# Altium PCB DC-DCBuckConv.PcbDoc (part 2 of 2)
Units mm, origin at the board's own origin, x right, y up, seen from the top; angles counter-clockwise.
Board outline 34.34 x 69.93 mm, 4 copper layers (Top Layer, GND, POWER, Bottom Layer), stack 1.369 mm thick; 52 components, 51 nets, 193 pads, 133 vias.
Unrouted connection lines stored in the file: 1.
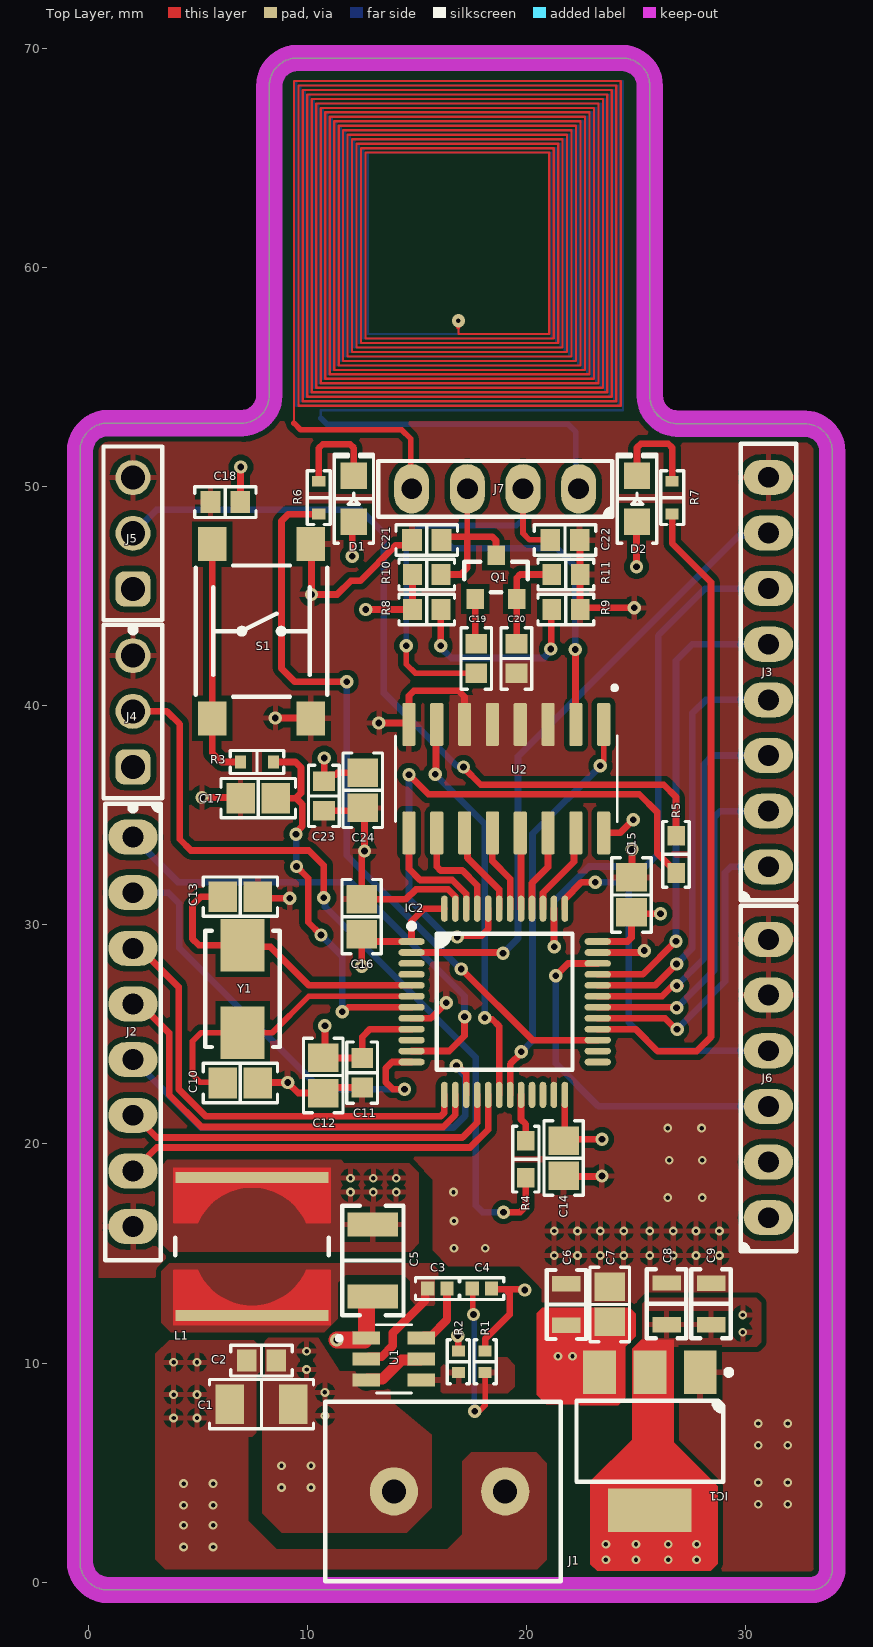
[diagram p0: Top Layer view]

## Via types
v1: diameter 0.4, hole 0.2, Top Layer to Bottom Layer, 74 vias
v2: diameter 0.61, hole 0.305, Top Layer to Bottom Layer, 58 vias
v3: diameter 0.61/0.61 (per signal layer), hole 0.203, Top Layer to Bottom Layer, 1 vias

## Nets (pads, with @x,y where several pads share a name; then routed paths per layer and width w, separated by ;. In a path a pad name is that pad's centre, name@x,y a point inside that pad or via, vN(x,y) a via of type N, cw(c..) or ccw(c..) an arc to the next point about the centre after c; other vN are vias at no path point) (continued)
+3.3: (continued)
  Top Layer w0.305: v2(6.96,50.902) 6.941,50.883 6.941,49.19 C18.2@6.967,49.165 ; C23.2 C23.2@10.77,36.591 ; v2(10.77,37.617) C23.2@10.77,36.591 ; v2(10.795,25.4) 10.795,24.003 10.869,23.929 C11.2 12.497,24.892 12.847,25.242 IC2.9 ; v2(12.04,46.838) 12.04,48.328 D1.1 ; v2(12.471,28.118) C16.2 12.808,29.242 IC2.1 14.749,30.167 15.324,30.742 IC2.48 ; C24.2 11.365,36.944 11.284,36.863 11.042,36.863 C23.2@10.77,36.591 ; v2(12.66,44.399) R8.2@14.835,44.399 ; R8.2 14.793,45.908 14.884,45.999 R10.2 ; C14.2 C14.2@21.744,20.207 ; IC2.24@21.747,21.795 21.744,21.792 C14.2@21.744,20.207 ; IC2.36 24.612,29.242 24.79,29.421 C15.2 24.854,30.505 v2(26.111,30.505) ; v2(23.444,20.218) 21.755,20.218 C14.2@21.744,20.207 ; U2.16 24.271,34.203 v2(24.867,34.798) ; v2(25.019,46.355) 25.019,48.378 D2.1
  other v1: 23.622,1.016 24.994,1.016 26.467,1.016 27.762,1.016 23.622,1.727 24.994,1.727 26.467,1.727 27.762,1.727 29.87,11.405 29.87,12.192
+5: C4.1 C5.2 C6.2 C7.2 IC1.3 L1.2 R1.2 | length 4.9
  Top Layer w0.305: R1.2 18.11,11.1 19.228,12.217 19.228,13.183 19.044,13.367 ; C4.1 18.43,13.367 19.044,13.367 ; v2(19.914,13.335) 19.882,13.367 19.044,13.367
  other v1: 21.438,10.312 22.098,10.312 11.963,17.805 13.005,17.805 14.046,17.805 11.963,18.44 13.005,18.44 14.046,18.44
AntenA: J7.4 | length 794.1
  Top Layer w0.102: 9.38,52.908 9.38,68.523 24.3,68.523 24.3,53.705 9.584,53.705 9.584,68.319 24.096,68.319 24.096,53.909 9.788,53.909 9.788,68.115 23.892,68.115 23.892,54.113 9.992,54.113 9.992,67.911 23.688,67.911 23.688,54.317 10.196,54.317 10.196,67.707 23.484,67.707 23.484,54.522 10.401,54.522 10.401,67.502 23.279,67.502 23.279,54.726 10.605,54.726 10.605,67.298 23.075,67.298 23.075,54.93 10.809,54.93 10.809,67.094 22.871,67.094 22.871,55.134 11.013,55.134 11.013,66.89 22.667,66.89 22.667,55.338 11.217,55.338 11.217,66.686 22.462,66.686 22.462,55.543 11.422,55.543 11.422,66.481 22.258,66.481 22.258,55.747 11.626,55.747 11.626,66.277 22.054,66.277 22.054,55.951 11.83,55.951 11.83,66.073 21.85,66.073 21.85,56.155 12.034,56.155 12.034,65.869 21.646,65.869 21.646,56.36 12.239,56.36 12.239,65.664 21.441,65.664 21.441,56.564 12.443,56.564 12.443,65.46 21.237,65.46 21.237,56.768 12.647,56.768 12.647,65.256 21.033,65.256 21.033,56.972 16.891,56.972 16.891,57.279
  Top Layer w0.204: 16.891,57.279 16.891,57.585
  Top Layer w0.254: 9.38,52.908 9.684,52.603 14.3,52.603 14.707,52.197 14.707,49.962 J7.4
AntenB: J7.1 | length 814.4
  Bottom Layer w0.102: 10.605,53.133 10.605,53.501 24.402,53.501 24.402,68.523 9.482,68.523 9.482,53.705 24.198,53.705 24.198,68.319 9.686,68.319 9.686,53.909 23.994,53.909 23.994,68.115 9.89,68.115 9.89,54.113 23.79,54.113 23.79,67.911 10.094,67.911 10.094,54.317 23.586,54.317 23.586,67.707 10.298,67.707 10.298,54.522 23.381,54.522 23.381,67.502 10.503,67.502 10.503,54.726 23.177,54.726 23.177,67.298 10.707,67.298 10.707,54.93 22.973,54.93 22.973,67.094 10.911,67.094 10.911,55.134 22.769,55.134 22.769,66.89 11.115,66.89 11.115,55.338 22.565,55.338 22.565,66.686 11.32,66.686 11.32,55.543 22.36,55.543 22.36,66.481 11.524,66.481 11.524,55.747 22.156,55.747 22.156,66.277 11.728,66.277 11.728,55.951 21.952,55.951 21.952,66.073 11.932,66.073 11.932,56.155 21.748,56.155 21.748,65.869 12.136,65.869 12.136,56.36 21.543,56.36 21.543,65.664 12.341,65.664 12.341,56.564 21.339,56.564 21.339,65.46 12.545,65.46 12.545,56.768 21.135,56.768 21.135,65.256 12.749,65.256 12.749,56.972 16.891,56.972 16.891,57.279
  Bottom Layer w0.204: 16.891,57.279 16.891,57.585
  Bottom Layer w0.254: 10.605,53.133 10.88,52.857 20.015,52.857 ; 19.888,52.857 20.015,52.857 ; J7.1 22.25,50.038 22.25,52.502 21.895,52.857 20.015,52.857
BOOT0: IC2.44 R5.2 | length 26.3
  Top Layer w0.305: v2(14.63,36.855) 15.519,35.966 25.146,35.966 25.959,35.154 25.959,33.287 26.822,32.423 R5.2 ; v2(16.84,29.451) 16.899,29.509 17.952,29.509 18.247,29.804 18.247,30.74 IC2.44
  Bottom Layer w0.305: v2(14.63,36.855) 14.63,31.191 16.371,29.451 v2(16.84,29.451)
BOOT1: IC2.20 R4.2 | length 2.2
  Top Layer w0.305: IC2.20 19.749,21.119 19.964,20.904 R4.2
CLR: IC2.19 U2.1 | length 18.7
  Top Layer w0.254: v2(23.368,37.262) 23.368,37.358 23.52,37.51 U2.1
  Top Layer w0.305: IC2.19 19.249,23.643 19.761,24.155 v2(19.761,24.206)
  Bottom Layer w0.305: v2(19.761,24.206) 20.269,24.714 20.269,34.163 v2(23.368,37.262)
Data_QA: IC2.40 U2.14 | length 3.8
  Top Layer w0.305: IC2.40 20.249,31.908 20.98,32.639 U2.14
Data_QB: IC2.41 U2.13 | length 3.5
  Top Layer w0.305: IC2.41 U2.13@19.749,34.203
Data_QC: IC2.42 U2.12 | length 3.8
  Top Layer w0.305: U2.12 18.44,32.918 19.249,32.11 IC2.42
Data_QD: IC2.43 U2.11 | length 4.1
  Top Layer w0.305: U2.11 17.307,34.066 17.307,33.061 18.747,31.621 18.747,30.745 IC2.43
ENP: IC2.18 U2.7 | length 18.3
  Top Layer w0.305: v2(15.824,36.881) 15.862,36.919 15.862,39.114 U2.7 ; v2(18.085,25.756) 18.143,25.697 18.431,25.697 18.749,25.379 IC2.18
  Bottom Layer w0.305: v2(15.824,36.881) 18.085,34.62 v2(18.085,25.756)
ENP_1: IC2.45 U2.10 | length 4.8
  Top Layer w0.305: U2.10 15.9,32.664 16.079,32.485 17.071,32.485 17.749,31.807 IC2.45
GND: C1.1 C2.1 C5.1 C6.1 C7.1 C8.1 C9.1 C10.1 C11.1 C12.1 C13.1 C14.1 C15.1 C16.1 C17.2 C18.1 C20.1 C21.1 C22.2 C23.1 C24.1 IC1.1 IC2.8 IC2.23 IC2.35 IC2.47 J1.1 J2.8 J3.8 J4.3 J5.3 J6.5 J6.6 R2.2 R9.1 R11.1 S1.1 S1.2 U1.1 U2.3 U2.4 U2.5 U2.6 U2.8 | length 53.5
  Top Layer w0.3: v2(16.866,11.252) 16.878,11.239 16.878,10.571 R2.2
  Top Layer w0.305: v2(5.182,35.814) 6.922,35.814 C17.2 ; C10.1 7.76,22.809 v2(9.093,22.809) 9.576,22.327 C12.1 10.971,22.579 C11.1 ; C13.1 7.81,31.217 v2(9.195,31.217) ; v2(8.534,39.446) 10.137,39.446 S1.2 ; S1.1 10.185,47.348 v2(10.185,45.085) 11.354,45.085 11.976,45.707 12.408,45.707 14.04,47.339 14.533,47.339 C21.1 ; C23.1 12.393,35.215 C24.1 12.598,35.268 v2(12.598,33.376) 12.598,33.293 12.471,33.166 C16.1 14.501,31.178 14.945,31.622 16.427,31.622 16.747,31.302 16.747,30.745 IC2.47 ; v2(13.259,39.218) 14.565,39.218 U2.8 14.63,40.462 14.859,40.691 16.891,40.691 17.166,40.416 17.166,39.157 U2.6 17.17,38.527 U2.6@17.318,38.379 ; IC2.8 15.633,25.742 v2(16.332,26.441) ; C14.1 21.73,18.517 23.419,18.517 v2(23.444,18.542) ; C22.2 22.436,47.567 22.436,46.007 R11.1 22.443,44.552 22.519,44.475 v2(24.917,44.475) ; IC2.35 25.205,28.742 25.292,28.829 v2(25.375,28.829) ; C15.1 24.816,32.194 v2(24.816,33.458)
  Top Layer w0.762: v2(11.328,11.049) 12.604,11.049 U1.1 12.69,12.862 12.859,13.031 C5.1
  other v1: 4.343,1.6 5.69,1.6 4.343,2.591 5.69,2.591 4.343,3.505 5.69,3.505 30.582,3.556 31.928,3.556 4.343,4.496 5.69,4.496 30.582,4.547 31.928,4.547 30.582,6.248 31.928,6.248 30.582,7.239 31.928,7.239 3.886,7.493 4.953,7.493 3.886,8.56 4.953,8.56 3.886,10.033 4.953,10.033 21.26,14.91 22.327,14.91 23.368,14.91 24.435,14.91 25.629,14.91 26.695,14.91 27.737,14.91 28.804,14.91 16.688,15.24 18.11,15.24 21.26,16.027 22.327,16.027 23.368,16.027 24.435,16.027 25.629,16.027 26.695,16.027 27.737,16.027 28.804,16.027 16.688,16.485 26.441,17.551 28.016,17.551 16.662,17.805 26.518,19.253 28.016,19.253 26.441,20.726 27.991,20.726
GreenLed: IC2.28 R7.1 | length 30.5
  Top Layer w0.305: IC2.28 24.974,25.242 25.984,24.232 27.762,24.232 28.423,24.892 28.423,45.644 26.645,47.422 R7.1
LOAD: IC2.46 U2.9 | length 5.4
  Top Layer w0.305: U2.9 14.63,32.563 15.14,32.053 16.606,32.053 17.247,31.413 17.247,30.745 IC2.46
NetC3_1: C3.1 L1.1 U1.2 | length 4.7
  Top Layer w0.381: U1.2 12.794,10.29 13.393,10.29 13.892,10.789 13.892,11.376 15.376,12.861 15.376,13.289 C3.1
NetC3_2: C3.2 U1.6 | length 2.9
  Top Layer w0.381: U1.6 15.304,11.24 15.634,11.24 16.371,11.977 C3.2@16.371,13.399
NetC4_2: C4.2 R1.1 R2.1 U1.4 | length 7.7
  Top Layer w0.254: C4.2 17.547,13.369 17.547,12.247 v2(17.577,12.217) ; v2(17.628,7.798) 17.696,7.866 17.901,7.866 18.11,8.075 R1.1
  Bottom Layer w0.254: v2(17.577,12.217) 17.602,12.192 17.602,7.823 v2(17.628,7.798)
NetC10_2: C10.2 IC2.6 Y1.2 | length 13.9
  Top Layer w0.254: C10.2 6.091,22.827 5.087,22.827 4.75,23.165 4.75,24.689 5.137,25.076 8.389,25.076 10.054,26.742 IC2.6
NetC13_2: C13.2 IC2.5 Y1.1 | length 14
  Top Layer w0.305: C13.2 5.131,31.293 4.75,30.912 4.75,29.362 5.036,29.076 Y1.1 7.114,28.998 8.314,28.998 10.07,27.242 IC2.5
NetC19_1: C19.1 C22.1 J7.2 | length 19.5
  Top Layer w0.254: v2(14.503,42.748) 14.503,41.91 14.924,41.489 C19.1 ; J7.2 19.837,47.879 20.142,47.574 C22.1
  Bottom Layer w0.254: v2(14.503,42.748) 14.503,47.574 15.164,48.235 19.533,48.235 19.837,48.539 J7.2
NetC19_2: C19.2 Q1.1 | length 2.1
  Top Layer w0.305: Q1.1 17.658,42.885 C19.2
NetC20_2: C20.2 Q1.2 R11.2 | length 4.7
  Top Layer w0.305: C20.2 19.558,42.864 Q1.2 19.558,45.851 19.707,45.999 R11.2
NetD1_2: D1.2 R6.2 | length 4.5
  Top Layer w0.305: R6.2 10.516,51.764 10.694,51.943 11.937,51.943 12.116,51.764 D1.2
NetD2_2: D2.2 R7.2 | length 4.6
  Top Layer w0.305: D2.2 25.044,51.79 25.223,51.968 26.466,51.968 26.645,51.79 R7.2
NetJ4_2: J4.2 R4.1 | length 36.9
  Top Layer w0.305: J4.2 3.581,39.751 4.166,39.167 4.166,33.909 4.674,33.401 10.058,33.401 10.744,32.715 v2(10.744,31.242) ; v2(18.948,16.891) 19.71,16.891 19.964,17.145 R4.1
  Bottom Layer w0.305: v2(10.744,31.242) 10.8,31.186 10.8,30.83 17.678,23.952 17.678,17.196 17.983,16.891 v2(18.948,16.891)
NetJ5_2: J5.2 R5.1 | length 36.7
  Top Layer w0.305: v2(17.12,37.211) 17.12,37.186 17.907,36.398 26.264,36.398 26.822,35.839 R5.1
  Bottom Layer w0.305: J5.2 3.099,48.946 12.421,48.946 13.487,47.879 13.487,40.589 16.807,37.269 17.061,37.269 v2(17.12,37.211)
NetR3_1: R3.1 S1.3 S1.4 | length 11
  Top Layer w0.305: S1.3 S1.4 5.649,37.861 6.071,37.44 R3.1
NetR8_1: R8.1 R9.2 | length 9
  Top Layer w0.305: v2(16.078,42.748) 16.086,42.756 16.086,44.392 R8.1 ; v2(21.107,42.596) 21.125,42.614 21.125,44.381 R9.2
  Bottom Layer w0.305: v2(16.078,42.748) 16.078,42.672 16.561,42.189 20.803,42.189 20.803,42.209 21.107,42.513 v2(21.107,42.596)
NRST: C17.1 IC2.7 R3.2 | length 17.9
  Top Layer w0.305: R3.2 9.449,37.44 9.703,37.186 9.703,36.017 9.476,35.79 ; C17.1 8.548,35.79 9.476,35.79 ; v2(9.474,34.138) 9.474,34.22 9.754,34.499 9.754,35.512 9.476,35.79 ; v2(9.5,32.664) 10.033,32.131 10.033,30.124 v2(10.617,29.54) ; v2(11.582,26.035) 11.665,26.035 11.872,26.242 IC2.7
  Bottom Layer w0.305: v2(9.474,34.138) 9.487,34.125 9.487,32.677 v2(9.5,32.664) ; v2(10.617,29.54) 11.582,28.575 v2(11.582,26.035)
PA1: IC2.11 J2.1 | length 22.7
  Top Layer w0.305: IC2.11 16.47,24.242 17.17,24.943 v2@17.17,25.799
  Bottom Layer w0.305: J2.1 4.089,31.953 11.963,31.953 17.17,26.746 v2(17.17,25.806)
PA2: IC2.12 J2.2 | length 20.2
  Top Layer w0.305: v2(14.427,22.504) 13.894,22.504 13.565,22.833 13.565,23.446 13.862,23.742 IC2.12
  Bottom Layer w0.305: J2.2 3.658,31.471 4.14,30.988 4.14,28.956 10.592,22.504 v2(14.427,22.504)
PA3: IC2.13 J2.3 | length 21
  Top Layer w0.305: J2.3 2.357,28.931 4.115,27.173 4.115,22.504 5.359,21.26 16.068,21.26 16.247,21.438 16.247,22.24 IC2.13
PA4: IC2.14 J2.4 | length 19.8
  Top Layer w0.305: J2.4 2.357,26.391 3.683,25.065 3.683,22.25 5.156,20.777 16.196,20.777 16.747,21.328 16.747,22.24 IC2.14
PA5: IC2.15 J2.5 | length 20.7
  Top Layer w0.305: v2(16.797,23.575) 16.88,23.575 17.177,23.277 17.249,23.277 IC2.15
  Bottom Layer w0.305: J2.5 2.042,23.851 5.141,20.752 16.662,20.752 17.195,21.285 17.195,23.108 16.797,23.506 v2(16.797,23.575)
PA6: IC2.16 J2.6 | length 17.7
  Top Layer w0.305: J2.6 2.104,21.311 3.12,20.295 17.069,20.295 17.749,20.975 IC2.16
PA7: IC2.17 J2.7 | length 18.6
  Top Layer w0.305: J2.7 2.054,18.771 3.12,19.837 17.424,19.837 18.249,20.662 IC2.17
PA8: IC2.29 J3.1 | length 14
  Top Layer w0.305: IC2.29 26.323,25.742 26.825,25.24 v2(26.871,25.24)
  Bottom Layer w0.305: v2(26.871,25.24) 29.058,27.426 29.058,32.385 29.327,32.654 J3.1
PA9: IC2.30 J3.2 | length 15.6
  Top Layer w0.305: IC2.30 v2@26.828,26.242
  Bottom Layer w0.305: v2(26.848,26.222) 26.862,26.222 28.575,27.935 28.575,34.925 28.844,35.194 J3.2
PA10: IC2.31 J3.3 | length 17.7
  Top Layer w0.305: IC2.31 26.184,26.742 26.663,27.221 v2(26.855,27.221) v2@27.043,27.221
  Bottom Layer w0.305: v2(26.855,27.221) 28.092,28.458 28.092,37.338 28.488,37.734 J3.3
PA11: IC2.32 J3.4 | length 19.5
  Top Layer w0.305: IC2.32 25.871,27.242 v2(26.848,28.219)
  Bottom Layer w0.305: v2(26.848,28.219) 27.559,28.931 27.559,39.649 28.184,40.274 J3.4
PA12: IC2.33 J3.5 | length 21.5
  Top Layer w0.305: IC2.33 25.304,27.742 v2(26.822,29.261)
  Bottom Layer w0.305: v2(26.822,29.261) 26.822,42.062 27.574,42.814 J3.5
PA15: IC2.38 J3.6 | length 25.3
  Top Layer w0.305: IC2.38 21.252,30.74 21.252,29.015 v2(21.26,29.007)
  Bottom Layer w0.305: v2(21.26,29.007) 21.26,31.079 22.845,32.664 25.425,32.664 26.01,33.249 26.01,43.205 28.158,45.354 J3.6
PC13: IC2.2 J3.7 | length 29.1
  Top Layer w0.305: IC2.2 14.752,28.74 18.885,28.74 v2(18.923,28.702)
  Bottom Layer w0.305: v2(18.923,28.702) 19.609,29.388 19.609,37.694 29.677,47.762 30.907,47.762 J3.7
RCO: IC2.39 U2.15 | length 4.1
  Top Layer w0.305: IC2.39 20.749,31.468 22.165,32.883 22.165,34.117 U2.15
RedLed: IC2.27 R6.1 | length 34.7
  Top Layer w0.305: R6.1 9.131,48.755 8.814,48.438 8.814,41.707 9.423,41.097 v2(11.786,41.097) ; v2(17.018,27.991) 20.267,24.742 IC2.27
  Bottom Layer w0.305: v2(11.786,41.097) 11.786,33.183 16.977,27.991 v2(17.018,27.991)
Sens_Out: C21.2 J7.3 Q1.3 R10.1 U2.2 | length 22.2
  Top Layer w0.254: 17.297,47.727 J7.3
  Top Layer w0.305: R10.1 16.993,45.999 17.297,46.304 17.297,47.727 ; C21.2 16.271,47.727 17.297,47.727 ; Q1.3 18.608,47.548 18.429,47.727 17.297,47.727 ; v2(22.225,42.57) 22.238,42.558 22.238,39.165 U2.2
  Bottom Layer w0.305: 16.027,47.777 16.612,47.193 21.387,47.193 22.225,46.355 v2(22.225,42.57)
SWDCLK: IC2.37 J6.4 | length 16.8
  Top Layer w0.305: IC2.37 21.749,31.187 22.515,31.953 v2(23.139,31.953)
  Bottom Layer w0.305: v2(23.139,31.953) 24.359,31.953 24.663,31.648 24.663,25.552 25.959,24.257 J6.4
SWDIO: IC2.34 J6.3 | length 16.7
  Top Layer w0.305: v2(21.336,27.686) 21.892,28.242 IC2.34
  Bottom Layer w0.305: v2(21.336,27.686) 21.336,23.673 23.292,21.717 J6.3
VCC: C1.2 C2.2 J1.2 U1.3 U1.5 | length 2.9
  Top Layer w0.508: U1.3 12.731,9.276 13.419,9.276 14.287,10.144 15.159,10.144 U1.5
  other v1: 8.814,4.318 10.16,4.318 8.814,5.309 10.16,5.309 10.795,7.595 10.795,8.661 9.957,9.703 9.957,10.541
pads on no net: IC2.3 IC2.4 IC2.10 IC2.21 IC2.22 IC2.25 IC2.26
copper on no net:
  other v3: 16.891,57.582

## Polygon pours and split planes (outlines as drawn)
GND on Top Layer "GND_L01_P029" (solid, remove dead copper, pour order 29): 21.615,5.401 21.615,0.457 22.174,-0.102 33.249,-0.102 34.163,0.813 34.163,51.943 33.122,52.984 0.584,52.984 -0.432,51.968 -0.432,17.856 -0.432,16.789 -0.457,16.764 -0.457,14.427 0.076,13.894 3.023,13.894 3.607,14.478 3.607,18.491 4.191,19.075 15.011,19.075 15.723,18.364 15.723,15.138 16.434,14.427 19.66,14.427 20.701,13.386 20.701,6.315
GND on Top Layer "GND_L01_P030" (solid, pour order 30): 17.475,5.918 20.447,5.918 20.93,5.436 20.93,1.016 20.498,0.584 3.505,0.584 3.048,1.041 3.048,6.985 3.117,7.054 7.043,7.054 7.29,6.807 7.29,2.794 8.585,1.499 16.383,1.499 17.069,2.184 17.069,5.512
GND on Top Layer "GND_L01_P028" (solid, pour order 28): 16.485,38.075 16.789,37.77 21.361,37.77 21.641,38.049 21.641,40.157 20.574,41.224 20.574,41.859 20.244,42.189 20.218,42.164 18.72,42.164 18.44,41.885 18.44,40.945 17.983,40.488 16.51,40.488 16.485,40.462
GND on Top Layer "GND_L01_P027" (solid, pour order 27): 7.823,10.77 7.544,11.049 3.683,11.049 3.048,10.414 3.048,6.934 3.353,6.629 7.468,6.629 7.823,6.985
GND on Top Layer "GND_L01_P026" (solid, pour order 26): 20.574,13.487 20.574,16.383 20.879,16.688 29.464,16.688 29.642,16.51 29.642,13.513 29.312,13.183 20.879,13.183
+5 on Top Layer "+5_L01_P022" (solid, pour order 22): 14.707,15.088 3.708,15.088 3.277,15.519 3.277,18.948 3.607,19.279 11.532,19.279 11.684,19.126 14.656,19.126 15.088,18.694 15.088,15.469
+3.3 on Top Layer "+3.3_L01_P021" (solid, pour order 21): 25.273,10.779 25.273,12.7 25.552,12.979 30.48,12.979 30.709,12.751 30.709,10.947 30.505,10.744 25.566,10.744
NetC3_1 on Top Layer "NETC3_1_L01_P023" (solid, remove dead copper, pour order 23): 3.683,14.554 3.327,14.199 3.327,11.836 3.759,11.405 10.756,11.405 11.379,12.028 11.379,13.665 11.735,14.021 14.402,14.021 14.681,13.741 14.681,12.903 14.961,12.624 15.773,12.624 15.977,12.827 15.977,14.249 15.672,14.554
VCC on Top Layer "Top Layer-VCC" (solid, remove dead copper, pour order 2): 7.925,3.15 8.814,2.261 14.529,2.261 15.672,3.404 15.672,6.733 13.803,8.285 13.75,9.415 13.538,9.627 11.481,9.627 10.49,11.151 9.957,11.151 8.204,11.151 7.925,10.871
NetC4_2 on Top Layer "NETC4_2_L01_P011" (solid, pour order 11): 19.108,10.254 19.456,9.906 19.456,8.915 19.152,8.611 14.3,8.611 14.122,8.788 14.122,9.5 14.402,9.779 16.053,9.779 16.528,10.254
GND on Bottom Layer "GND_L04_P031" (solid, remove dead copper, pour order 31): 21.336,5.274 21.336,0.33 21.895,-0.229 32.969,-0.229 33.884,0.686 33.884,51.816 32.842,52.857 0.305,52.857 -0.711,51.841 -0.711,17.729 -0.711,16.662 -0.737,16.637 -0.737,14.3 -0.203,13.767 2.743,13.767 3.327,14.351 3.327,18.364 3.912,18.948 15.113,18.948 15.697,18.364 15.697,15.138 16.485,14.351 19.329,14.351 20.422,13.259 20.422,6.188
no net on GND (split plane): 24.975,68.748 25.037,68.646 25.083,68.536 25.111,68.42 25.119,68.313 25.118,68.301 25.118,54.153 25.119,54.146 25.127,53.978 25.131,53.952 8.749,53.952 8.757,54.004 8.765,54.172 8.765,54.178 8.765,68.301 8.764,68.313 8.773,68.42 8.8,68.536 8.846,68.646 8.909,68.748 8.98,68.832 24.904,68.832
GND on GND (split plane): 25.329,53.314 25.418,53.164 25.523,53.023 25.64,52.894 25.769,52.777 25.91,52.673 26.059,52.583 26.217,52.508 26.382,52.449 26.551,52.407 26.724,52.381 26.892,52.373 26.899,52.372 32.69,52.372 32.703,52.374 32.809,52.365 32.925,52.337 33.036,52.292 33.138,52.229 33.228,52.151 33.306,52.061 33.369,51.959 33.414,51.848 33.442,51.732 33.451,51.626 33.449,51.613 33.449,0.61 33.45,0.599 33.443,0.52 33.417,0.435 33.374,0.356 33.318,0.287 33.248,0.23 33.169,0.188 33.084,0.162 33.005,0.154 32.995,0.155 0.889,0.155 0.876,0.154 0.77,0.162 0.654,0.19 0.543,0.236 0.441,0.298 0.35,0.376 0.273,0.467 0.21,0.569 0.164,0.679 0.137,0.795 0.128,0.902 0.129,0.914 0.129,51.638 0.128,51.651 0.137,51.757 0.164,51.874 0.21,51.984 0.273,52.086 0.35,52.177 0.441,52.255 0.543,52.317 0.654,52.363 0.77,52.391 0.876,52.399 0.889,52.398 6.985,52.398 6.991,52.398 7.159,52.407 7.332,52.432 7.502,52.475 7.666,52.534 7.824,52.608 7.974,52.698 8.114,52.802 8.244,52.919 8.361,53.049 8.465,53.189 8.555,53.339 8.578,53.388 25.293,53.388
no net on POWER (split plane): 24.478,69.053 24.594,69.025 24.704,68.979 24.806,68.917 24.897,68.839 24.975,68.748 25.037,68.646 25.083,68.536 25.111,68.42 25.119,68.313 25.118,68.301 25.118,54.181 8.765,54.181 8.765,68.301 8.764,68.313 8.773,68.42 8.8,68.536 8.846,68.646 8.909,68.748 8.986,68.839 9.077,68.917 9.179,68.979 9.29,69.025 9.406,69.053 9.497,69.06 9.525,69.06 24.359,69.06 24.387,69.06
+5 on POWER (split plane): 15.244,18.394 15.75,17.887 16.763,16.874 18.825,14.812 20.019,13.618 20.077,13.574 20.106,13.562 20.145,13.545 20.218,13.536 25.055,13.536 25.499,13.091 25.499,8.829 24.47,7.8 19.345,7.8 13.255,13.89 13.197,13.935 13.177,13.943 13.129,13.963 13.056,13.972 11.775,13.972 10.569,15.179 10.569,18.476 10.988,18.895 14.742,18.895
+3.3 on POWER (split plane): 25.254,53.472 25.329,53.314 25.418,53.164 25.523,53.023 25.64,52.894 25.769,52.777 25.91,52.673 26.059,52.583 26.217,52.508 26.382,52.449 26.551,52.407 26.724,52.381 26.892,52.373 26.899,52.372 32.69,52.372 32.703,52.374 32.809,52.365 32.925,52.337 33.036,52.292 33.138,52.229 33.228,52.151 33.306,52.061 33.369,51.959 33.414,51.848 33.442,51.732 33.451,51.626 33.449,51.613 33.449,0.61 33.45,0.599 33.443,0.52 33.417,0.435 33.374,0.356 33.318,0.287 33.248,0.23 33.169,0.188 33.084,0.162 33.005,0.154 32.995,0.155 0.889,0.155 0.876,0.154 0.77,0.162 0.654,0.19 0.543,0.236 0.441,0.298 0.35,0.376 0.273,0.467 0.21,0.569 0.164,0.679 0.137,0.795 0.128,0.902 0.129,0.914 0.129,51.638 0.128,51.651 0.137,51.757 0.164,51.874 0.21,51.984 0.273,52.086 0.35,52.177 0.441,52.255 0.543,52.317 0.654,52.363 0.77,52.391 0.876,52.399 0.889,52.398 6.985,52.398 6.991,52.398 7.159,52.407 7.332,52.432 7.502,52.475 7.666,52.534 7.824,52.608 7.974,52.698 8.114,52.802 8.244,52.919 8.361,53.049 8.465,53.189 8.555,53.339 8.63,53.497 8.673,53.617 25.202,53.617

## Keep-outs
Keep-Out Layer:
  the board outline again, w1.2

## Other copper
Top Layer:
  region net +3.3: 23.216,0.508 28.397,0.508 28.727,0.838 28.727,4.369 26.721,6.375 26.721,11.055 25.229,11.055 24.816,10.643 24.816,6.502 22.911,4.597 22.911,0.813
  region net +5: 22.428,8.077 24.181,8.077 24.511,8.407 24.511,10.744 24.994,11.227 24.994,12.243 24.714,12.522 20.726,12.522 20.472,12.268 20.472,8.56 20.904,8.128 22.454,8.128
GND (plane layer: these items are gaps in the copper):
  lines w0.559: 25.552,53.848 25.654,53.746 ; 8.382,53.67 25.476,53.67 25.578,53.772 25.578,69.113 8.382,69.113 8.382,53.67
POWER (plane layer: these items are gaps in the copper):
  lines w0.559: 8.357,53.899 8.357,69.342 25.552,69.342 25.552,54 25.451,53.899 8.357,53.899 ; 10.287,15.062 11.659,13.691 13.056,13.691 19.228,7.518 24.587,7.518 25.781,8.712 25.781,13.208 25.171,13.818 20.218,13.818 19.025,15.011 16.962,17.074 15.95,18.086 15.443,18.593 14.859,19.177 10.871,19.177 10.287,18.593 10.287,15.062